# Altium PCB negative-join.PcbDoc
Units mil, origin at the board's own origin, x right, y up, seen from the top; angles counter-clockwise.
Board outline 3264.16 x 2238.51 mil, 2 copper layers (Top Layer, Bottom Layer); 4 components, 1 nets, 17 pads, 0 vias.
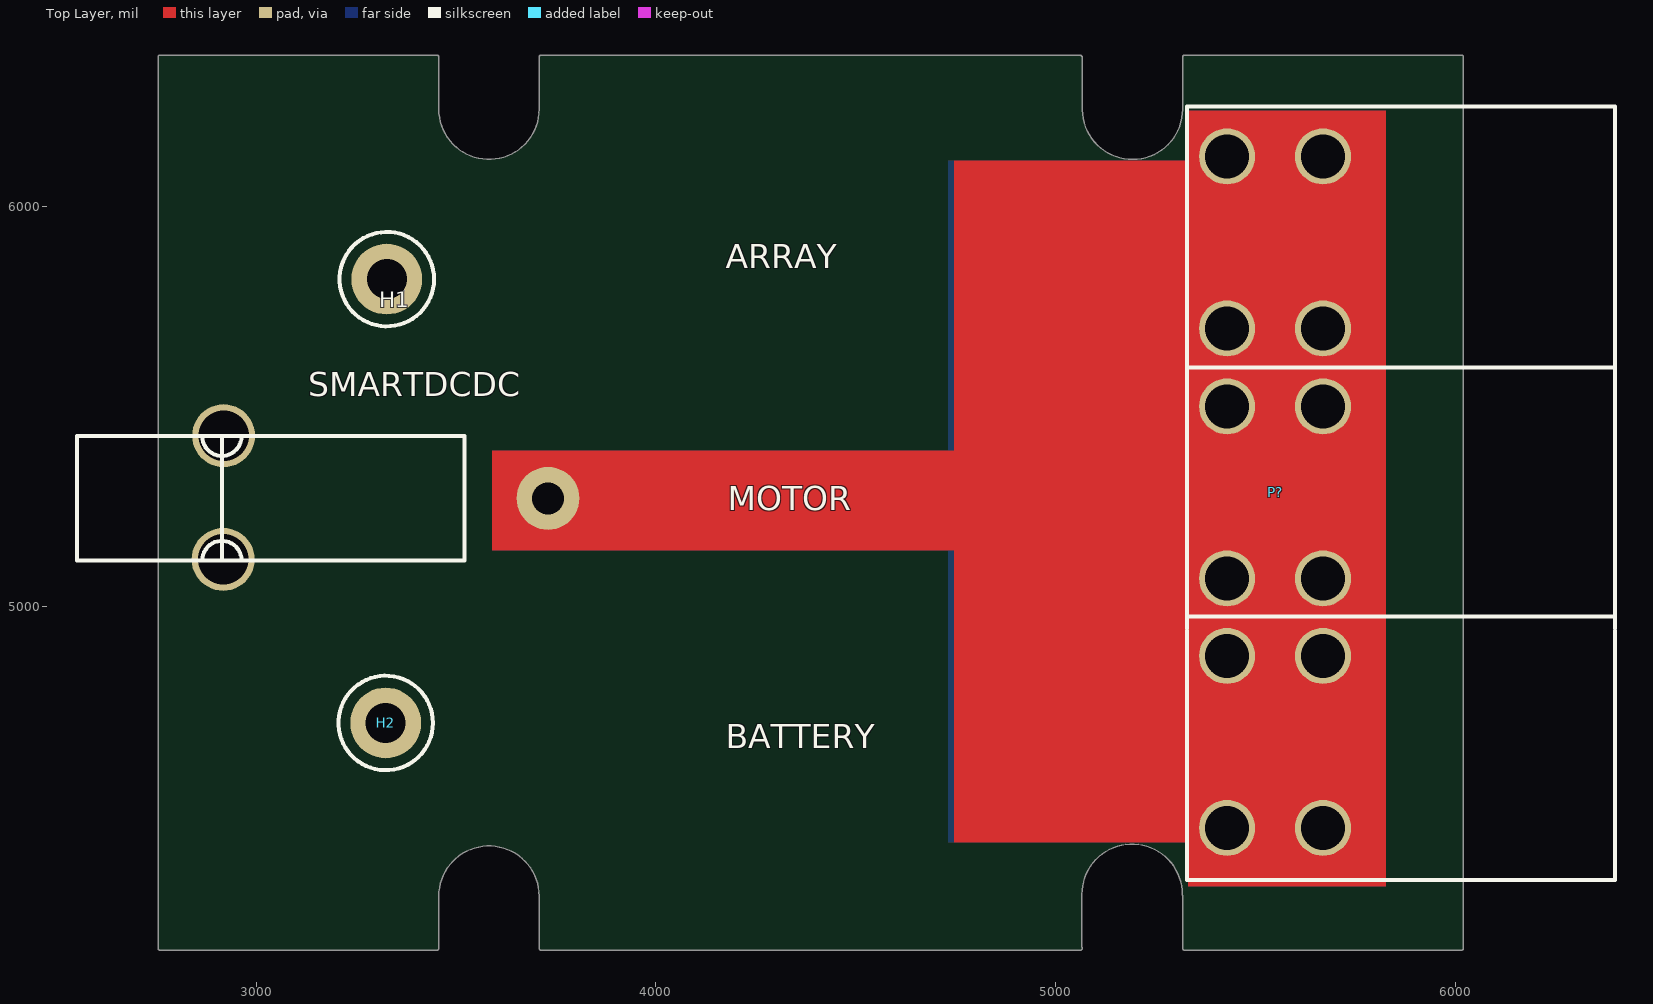
[diagram p0: Top Layer view]
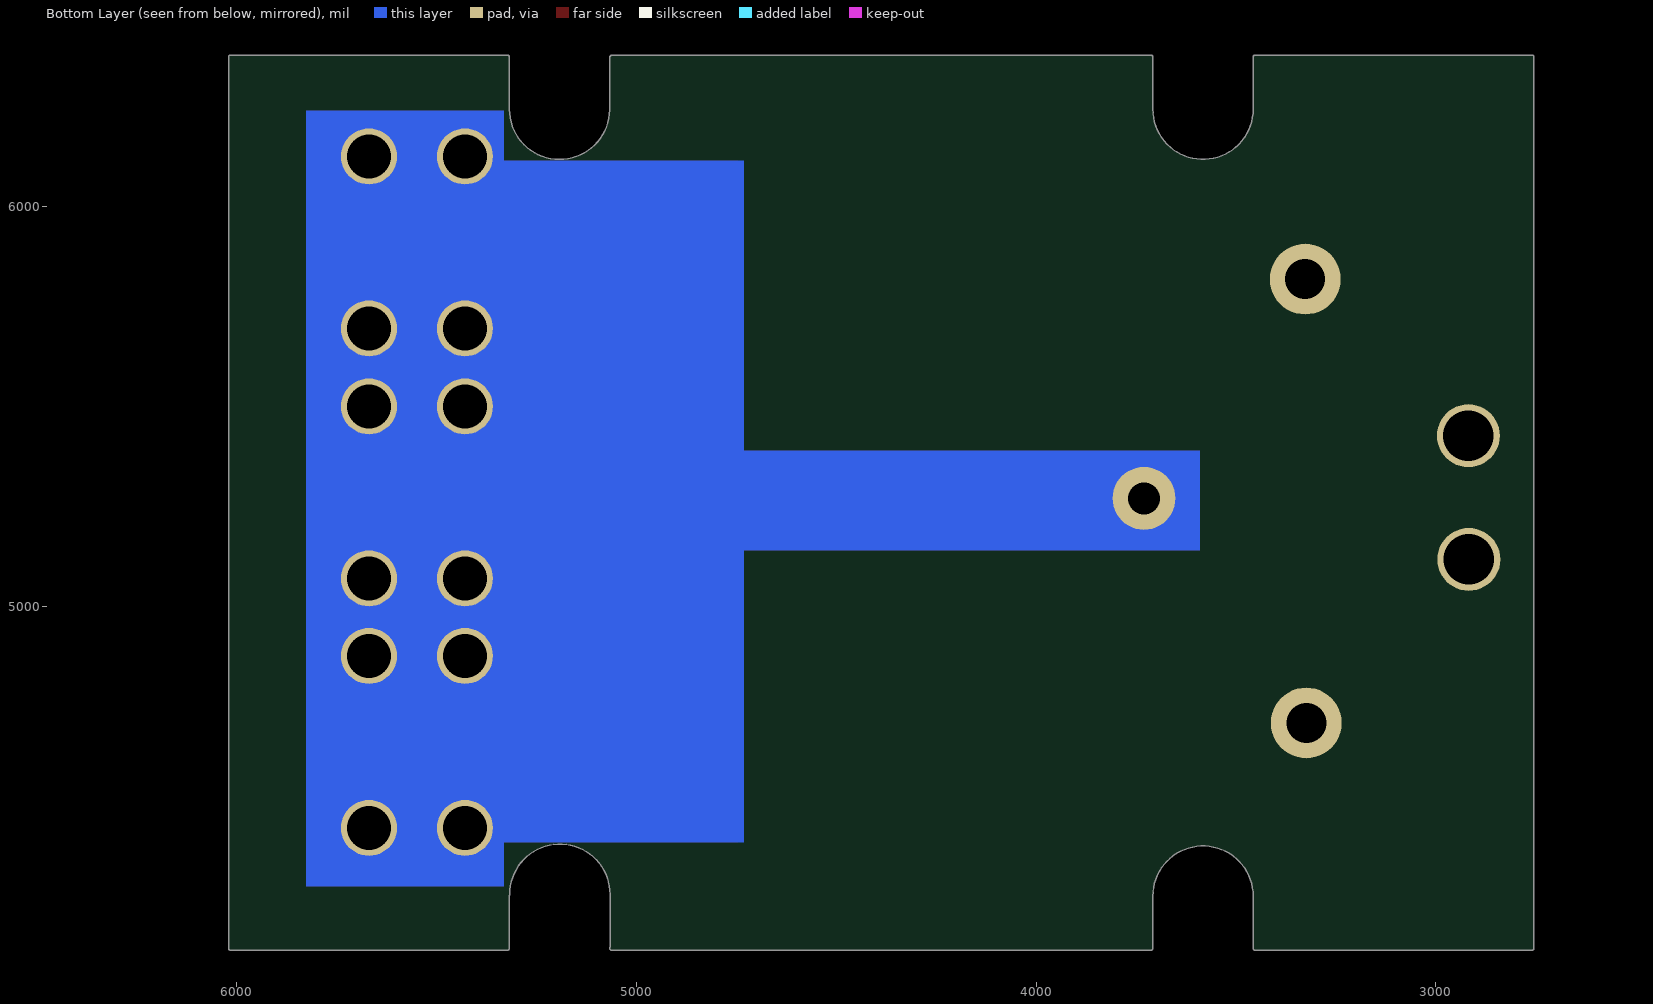
[diagram p1: Bottom Layer view, seen from below]

## Layer stack, top to bottom
Top Layer: signal copper 1.4
Dielectric: dielectric 12.6, FR-4, Dk 4.8
Bottom Layer: signal copper 1.4

## Board outline
2760,4139.98 3450.93,4140.08 ccw(c3451.92,4145) 3456.94,4145 3456.94,4275.44 cw(c3582.43,4275.44) 3707.93,4275.44 3707.93,4145 ccw(c3712.94,4145) 3712.94,4139.98 5060.98,4139.98 ccw(c5060.98,4145) 5065.99,4145 ccw(c5060.98,4145) 5065.02,4147.97 5065.02,4275.44 ccw(c5060,4275.44) 5064.47,4277.72 ccw(c5060,4280) 5065.02,4280 cw(c5190.51,4280) 5316.01,4280 ccw(c5321.02,4280) 5317.17,4276.79 ccw(c5322,4275.44) 5316.98,4275.44 5316.98,4145 ccw(c5322,4145) 5322.1,4139.99 ccw(c5322.2,4145) 5322.2,4139.98 6014.13,4139.98 ccw(c6014.13,4145) 6019.14,4145 6019.14,6373.48 ccw(c6014.13,6373.48) 6014.01,6378.49 ccw(c6013.93,6373.48) 6013.93,6378.49 5322,6378.49 ccw(c5322,6373.48) 5316.98,6373.48 5316.98,6243.16 cw(c5191.49,6243.16) 5066,6241.74 5066,6372.18 ccw(c5060.98,6372.18) 5064.44,6375.81 ccw(c5060,6373.48) 5060,6378.49 3712.94,6378.49 ccw(c3712.94,6373.48) 3707.93,6373.48 3707.93,6243.16 cw(c3582.43,6243.16) 3456.94,6243.16 ccw(c3451.92,6243.16) 3456.94,6243.26 ccw(c3451.92,6243.36) 3456.94,6243.36 3456.94,6373.48 ccw(c3451.92,6373.48) 3451.92,6378.49 2760,6378.49 ccw(c2760,6373.48) 2754.99,6373.48 2754.99,4145.1 ccw(c2760,4145.1) 2754.99,4145.05 ccw(c2760,4145)

## Design rules (kind name [scope] priority, off if disabled: settings)
Clearance [All] p1: gap=10
PolygonConnect [All] p1: connectstyle=Relief reliefconductorwidth=10 reliefentries=4 polygonreliefangle="90 Angle"
RoutingVias [All] p1: holewidth=28 width=50 viastyle="Through Hole" minholewidth=28 minwidth=50 maxholewidth=28 maxwidth=50
SilkscreenOverComponentPads [All] p1: minsilkscreentomaskgap=10
SolderMaskExpansion [All] p1: expansion=4
Width [All] p1: maxlimit=10 minlimit=10 preferedwidth=10
27 further rules are at their usual default settings.

## Classes and differential pairs
component class negative-join: P? SMARTDCDC

## Components (designator, comment, footprint, x,y, rotation, side; value= is the part's Value field where it differs from the comment)
H1 "HOLE" M2.5 3326.93,5818.23 r0 top
H2 "HOLE" M2.5 3324.17,4708.39 r0 top
P? "Header 3" ANDERSON_POWERCLAW_3 5322,6255 r0 top
SMARTDCDC "TEST" ANDERSON_MINI 4265,5270 r90 top

## Footprints (in the part's own frame and the unit in brackets; to place one, negate y for a bottom-side part, rotate by r counter-clockwise, add the part's x,y. Pads: shape width x height; smd on the part's side, far side on the other; paste and mask are expansions set on the pad)
ANDERSON_MINI [mm]
  round 4 hole 3.2: 0(-3.878,34.221) 0(3.981,34.195)
  round 4 hole 2.032: 1(0,13.589)
  silkscreen extent -3.95,18.9 3.95,43.5
ANDERSON_POWERCLAW_3 [mil]
  round 140 hole 110: 1(105.91,-560.12) 1(105.91,-130.12) 1(345.91,-560.12) 1(345.91,-130.12) 2(105.91,-1809.13) 2(105.91,-1379.13) 2(105.91,-1185.12) 2(105.91,-755.12) 2(345.91,-1809.13) 2(345.91,-1379.13) 2(345.91,-1185.12) 2(345.91,-755.12)
  silkscreen extent 6,-1939 1076,-5
M2.5 [mm]
  round 4.5 hole 2.54: 1(0,0)
  silkscreen extent -3,-3 3,3

## Part data
H1 H2: "Hole"
P?: "Header, 3-Pin"
SMARTDCDC: "TEST POINT"

## Nets (pads, with @x,y where several pads share a name; then routed paths per layer and width w, separated by ;. In a path a pad name is that pad's centre, name@x,y a point inside that pad or via, vN(x,y) a via of type N, cw(c..) or ccw(c..) an arc to the next point about the centre after c; other vN are vias at no path point)
NetP?_1: P?.1 P?.2
pads on no net: H1.1 H2.1 SMARTDCDC.0 SMARTDCDC.1

## Other copper
Top Layer:
  rectangle net NetP?_1: 4745,4410 5390,6115
  rectangle net NetP?_1: 5330,4300 5825,6240
  rectangle net NetP?_1: 3590,5140 5075,5390
Bottom Layer:
  rectangle net NetP?_1: 5330,4300 5825,6240
  rectangle net NetP?_1: 4730,4410 5390,6115
  rectangle net NetP?_1: 3590,5140 5075,5390

## Silkscreen, mask and mechanical layers (free items; w line width, h text height)
Top Overlay:
  text "ARRAY" at 4175,5845 h60
  text "MOTOR" at 4180,5240 h60
  text "BATTERY" at 4175,4645 h60
Top Solder:
  rectangle: 4745,4410 5390,6115
  rectangle: 5330,4300 5825,6240
Mechanical 1:
  lines w10: 2760,4145 3451.92,4145.1 ; 2760,4145.1 2760,6373.48 3451.92,6373.48 3451.92,6243.36 ; 3451.92,4145 3451.92,4275.44 cw(c3582.43,4275.44) 3712.94,4275.44 3712.94,4145 5060.98,4145 ; 3451.92,6243.16 ccw(c3582.43,6243.16) 3712.94,6243.16 3712.94,6373.48 5060,6373.48 ; 5060,4145 5060,4275.44 ; 5060,4280 cw(c5190.51,4280) 5321.02,4280 ; 5060.98,6238.7 5060.98,6372.18 ; 5060.98,6243.16 ccw(c5191.49,6243.16) 5322,6243.16 5322,6373.48 6013.93,6373.48 6013.93,6255 6400,6255 6400,4315 6020,4315 6014.13,4309.13 6014.13,4145 5322.2,4145 ; 5322,4145 5322,4275.44